# EAGLE board camera (EAGLE 6.5.0)
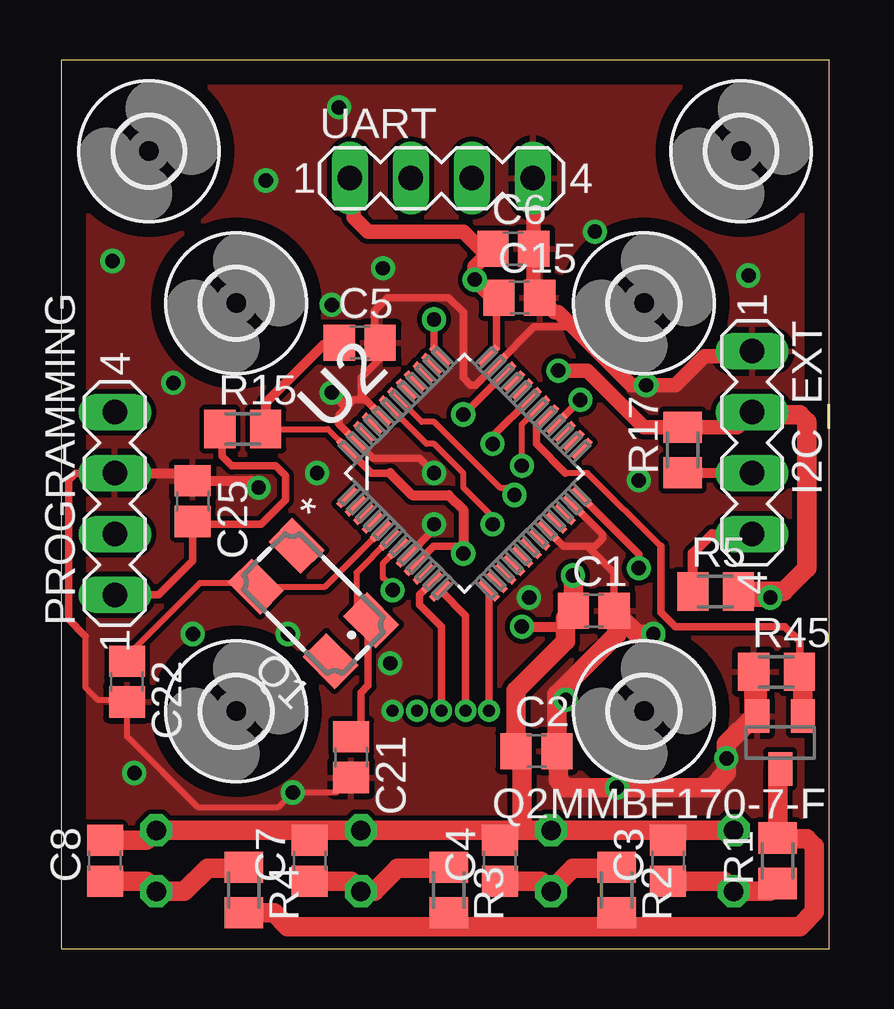
[diagram p0: board, top side]
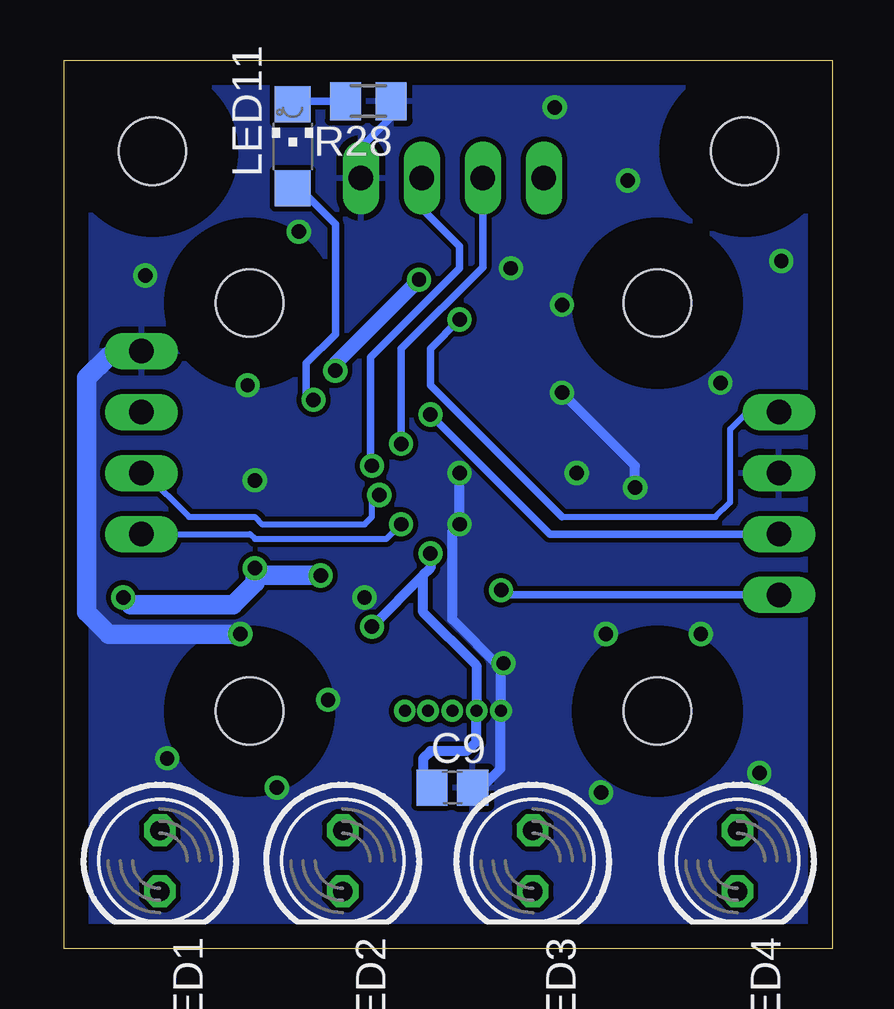
[diagram p1: board, bottom side, seen from below]

Size 32.03 x 37.02 mm. Coordinates in mm from the lower left corner, seen from the top.
Outline: 0,0 32.03,0 32.03,37.02 0,37.02 0,0
Copper layers (1*16): Top 0.035mm / dielectric 1.5mm / Bottom 0.035mm
Design rules "default": minimum track width 10mil, minimum drill 24mil, track to track 8mil, track to pad 8mil, pad to pad 8mil, via to via 8mil, smd to smd 8mil, copper to edge 40mil, drill to drill 8mil, minimum pad ring 10mil, minimum via ring 8mil, stop-mask expansion 4mil, vias tented up to drill 0mil, thermal gap 10mil

## Footprints (pad centres in the part's own frame; a part is rotated, then mirrored left to right if it is on the bottom)
C0805 = smd 1.3 x 1.5: 1 -0.85,0; 2 0.85,0
2,8 = hole 2.8: 0,0
MA04-1 = drill 1.016 long: 1 -3.81,0; 2 -1.27,0; 3 1.27,0; 4 3.81,0
LED5MM = drill 0.813 octagon: A -1.27,0; K 1.27,0
CHIPLED_1206 = smd 1.5 x 1.5: A 0,-1.75; C 0,1.75
CTS406 = smd 1.9 x 1.4: 1 -2.2,-1.2; 2 2.2,-1.2; 3 2.2,1.2; 4 -2.2,1.2
SOT23 = smd 1 x 1.4: 1 -0.95,-1.1; 2 0.95,-1.1; 3 0,1.1
M0805 = smd 1.3 x 1.6: 1 -0.95,0; 2 0.95,0
QFP50P900X900X160-48N = smd 1.041 x 0.279: 1 -4.166,2.743; 2 -4.166,2.261; 3 -4.166,1.753; 4 -4.166,1.245; 5 -4.166,0.762; 6 -4.166,0.254; 7 -4.166,-0.254; 8 -4.166,-0.762; 9 -4.166,-1.245; 10 -4.166,-1.753; 11 -4.166,-2.261; 12 -4.166,-2.743; 25 4.166,-2.743; 26 4.166,-2.261; 27 4.166,-1.753; 28 4.166,-1.245; 29 4.166,-0.762; 30 4.166,-0.254; 31 4.166,0.254; 32 4.166,0.762; 33 4.166,1.245; 34 4.166,1.753; 35 4.166,2.261; 36 4.166,2.743 | smd 0.279 x 1.041: 13 -2.743,-4.166; 14 -2.261,-4.166; 15 -1.753,-4.166; 16 -1.245,-4.166; 17 -0.762,-4.166; 18 -0.254,-4.166; 19 0.254,-4.166; 20 0.762,-4.166; 21 1.245,-4.166; 22 1.753,-4.166; 23 2.261,-4.166; 24 2.743,-4.166; 37 2.743,4.166; 38 2.261,4.166; 39 1.753,4.166; 40 1.245,4.166; 41 0.762,4.166; 42 0.254,4.166; 43 -0.254,4.166; 44 -0.762,4.166; 45 -1.245,4.166; 46 -1.753,4.166; 47 -2.261,4.166; 48 -2.743,4.166

## Placement (x,y rotation side)
C1  10uF  [C0805]  22.2,14.07 0 top
C2  100n  [C0805]  19.81,8.23 0 top
C3  100n  [C0805]  25.3,3.66 90 top
C4  100n  [C0805]  18.29,3.66 90 top
C5  100n  [C0805]  12.45,25.25 0 top
C6  10uF  [C0805]  18.85,29.16 0 top
C7  100n  [C0805]  10.36,3.66 90 top
C8  100n  [C0805]  1.83,3.66 90 top
C9  100n  [C0805]  15.85,6.71 0 bottom
C15  100n  [C0805]  19.1,27.13 0 top
C21  18p  [C0805]  12.09,7.98 270 top
C22  18p  [C0805]  2.74,11.13 270 top
C25  100n  [C0805]  5.49,18.64 270 top
H1  MOUNT-HOLE2.8  [2,8]  3.66,33.22 0 top
H2  MOUNT-HOLE2.8  [2,8]  28.35,33.22 0 top
H3  MOUNT-HOLE2.8  [2,8]  7.3,9.89 0 top
H4  MOUNT-HOLE2.8  [2,8]  24.3,9.89 0 top
H5  MOUNT-HOLE2.8  [2,8]  7.3,26.89 0 top
H6  MOUNT-HOLE2.8  [2,8]  24.3,26.89 0 top
I2C_EXT  [MA04-1]  28.8,21.08 270 top
LED1  [LED5MM]  28.04,3.66 270 bottom
LED2  [LED5MM]  20.42,3.66 270 bottom
LED3  [LED5MM]  12.5,3.66 270 bottom
LED4  [LED5MM]  3.96,3.66 270 bottom
LED11  [CHIPLED_1206]  22.5,33.43 0 bottom
PROGRAMMING  [MA04-1]  2.24,18.54 90 top
Q1  8MHz  [CTS406]  10.52,14.38 135 top
Q2MMBF170-7-F  BSS123  [SOT23]  29.97,8.59 180 top
R1  22R  [M0805]  29.87,3.66 90 top
R2  22R  [M0805]  23.16,2.44 270 top
R3  22R  [M0805]  16.15,2.44 270 top
R4  22R  [M0805]  7.62,2.44 270 top
R5  4k7  [M0805]  27.28,14.88 0 top
R15  47k  [M0805]  7.57,21.64 0 top
R17  4k7  [M0805]  25.91,20.78 90 top
R28  330  [M0805]  19.35,35.31 180 bottom
R45  47k  [M0805]  29.82,11.53 0 top
U2  STM32F103C6T6A  [QFP50P900X900X160-48N]  16.81,19.81 45 top
UART  [MA04-1]  15.85,32.11 0 top

## Library data of the parts
C1-C9 C15 C21 C22 C25 R1-R5 R15 R17 R28 R45 = resistor
H1-H6 = holes
I2C_EXT PROGRAMMING UART = con-lstb; OC_FARNELL: unknown; OC_NEWARK: unknown
LED1-LED4 LED11 = led
Q1 = crystal; OC_FARNELL: unknown; OC_NEWARK: unknown
Q2MMBF170-7-F = transistor-small-signal
U2 = stm32f103_lqfp48; MPN: STM32F103C6T6A; OC_FARNELL: 1972391; OC_NEWARK: 72T2643; PACKAGE: 48LQFP; SUPPLIER: STMicroelectronics

## Nets
+3V3: C1.1 C2.1 C3.2 C4.2 C5.1 C6.1 C7.2 C8.2 C9.1 C15.1 I2C_EXT.2 LED1.A LED2.A LED3.A LED4.A R5.2 R15.2 R17.2 U2.9 U2.24 U2.36 U2.48 UART.1
ADC1: U2.11
CLK: U2.12
GND: C1.2 C2.2 C5.2 C6.2 C9.2 C15.2 C21.2 C22.2 C25.1 I2C_EXT.1 PROGRAMMING.3 Q2MMBF170-7-F.2 R28.1 R45.1 U2.8 U2.20 U2.23 U2.35 U2.44 U2.47 UART.4
IR_CONTROLL: Q2MMBF170-7-F.1 R45.2 U2.29
LED_1: LED11.A U2.28
N$1: LED11.C R28.2
N$5: C3.1 LED1.K R1.1
N$7: C4.1 LED2.K R2.1
N$9: C7.1 LED3.K R3.1
N$11: C8.1 LED4.K R4.1
N$26: Q2MMBF170-7-F.3 R1.2 R2.2 R3.2 R4.2
OSCIN: C22.1 Q1.3 U2.5
OSCOUT: C21.1 Q1.1 U2.6
RESET: C25.2 PROGRAMMING.1 R15.1 U2.7
SCL: I2C_EXT.3 R17.1 U2.42
SDA: I2C_EXT.4 R5.1 U2.43
SI: U2.13
SWCLK: PROGRAMMING.4 U2.37
SWDIO: PROGRAMMING.2 U2.34
UART_RX: U2.31 UART.2
UART_TX: U2.30 UART.3
VBAT: U2.1

## Tracks (layer width: path | path; a pad name or v marks a point on that pad's centre or on a via)
+3V3  (via drill 0.5 pad 0.61, 0.6)
  Top 0.254: R15.2 11.11,21.64 U2.48
  Top 0.305: v16.76,16.46 16.46,16.76 15.53,16.76 U2.9 14.77,15.99 | 13.72,19.81 12.94,19.81 U2.48 | v24.08,15.85 24.08,16.43 U2.24 | U2.36 18.15,25.03 18.15,27.03 C15.1
  Top 0.406: 13.72,19.81 14.63,18.9 16.15,18.9 16.76,18.29 v16.76,16.46 | 17.79,28.96 C6.1 | v19.2,13.41 20.69,13.41 C1.1 | R15.2 8.53,21.66 8.53,22.76 10.92,25.15 11.49,25.15 C5.1
  Top 0.61: 17.79,28.96 17.68,28.96 16.76,29.87 12.8,29.87 12.19,30.48 12.19,31.95 UART.1 | 28.3,14.88 R5.2 | v20.73,24.08 21.95,24.08 24.3,21.73 R17.2 28.18,21.73 I2C_EXT.2 | C15.1 17.98,27.13 v17.24,27.87 17.24,28.4 C6.1
  Top 0.813: C8.2 3.54,4.51 LED4.A 10.67,4.93 | 18.71,4.93 LED3.A 10.67,4.93 | 25.3,4.93 LED2.A 18.95,4.93 | 25.3,4.93 LED1.A | C7.2 10.36,4.62 10.67,4.93 | 18.71,4.93 C4.2 | C3.2 25.3,4.93 | v21.34,15.54 v21.35,15.53 C1.1 21.03,13.75 21.03,12.8 18.96,10.73 C2.1 19.2,7.99 19.2,5.18 18.95,4.93 | v29.57,14.63 28.48,14.63 R5.2 | 28.3,14.88 30.12,14.88 31.09,15.85 31.09,21.95 30.79,22.25 28.91,22.25 I2C_EXT.2 | 18.71,4.93 18.95,4.93
  Bottom 0.406: v16.76,16.46 16.76,15.85 17.07,15.54 | 17.07,15.54 v19.2,13.41 | C9.1 17.07,6.77 17.07,7.92 16.76,8.23 15.24,8.23 14.85,8.62 14.85,9.89 v14.83,9.91 14.85,9.92 14.85,11.8 17.07,14.02 17.07,15.54
  Bottom 0.61: v20.73,24.08 20.73,24.38 v17.24,27.87
  Bottom 0.813: v21.34,15.54 23.77,15.54 v24.08,15.85 24.08,15.24 24.99,14.33 29.26,14.33 v29.57,14.63
ADC1  (via drill 0.5 pad 0.61)
  Top 0.305: U2.11 14.94,14.74 14.94,14.33 15.85,13.41 v15.85,9.91
CLK  (via drill 0.5 pad 0.61)
  Top 0.305: 15.54,14.66 U2.12 16.87,13.87 v16.87,9.91
GND  (via drill 0.5 pad 0.61, 0.6)
  Top 0.254: 1,13.02 1,10.88 1.52,10.36 2.65,10.36 C22.2 2.74,8.84 5.69,5.89 9.04,5.89 v9.65,6.5 11.47,6.5 C21.2
  Top 0.305: C1.2 23.05,15.66 21.95,16.76 | 21.95,16.76 20.94,16.76 U2.20 | 21.95,16.76 22.25,16.76 22.55,17.07 22.55,17.27 U2.23 | 12.69,22.86 12.19,22.86 11.89,22.56 11.58,22.25 11.58,21.85 U2.47 13.01,20.42 14.94,20.42 v15.54,19.81 | 12.69,22.86 U2.44 | v15.54,17.68 15.54,17.46 U2.8 | 21.64,25.6 21.34,25.91 19.71,25.91 U2.35 17.27,23.47 17.07,23.47 16.76,23.77 16.76,26.52 16.15,27.13 13.61,27.13 13.06,26.57 13.06,25.49 C5.2 13.3,24.57 12.5,23.77 12.5,23.05 12.69,22.86 | 1,13.02 0.3,13.72 0.3,19.51 0.61,19.81 PROGRAMMING.3
  Top 0.406: PROGRAMMING.3 5.17,19.81 C25.1 7.94,19.49 v8.23,19.2 | v11.28,23.16 11.89,22.56
  Top 0.61: UART.4 19.7,32.07 C6.2 19.7,27.38 C15.2 20.56,26.52 20.73,26.52 21.64,25.6 23.77,23.47 25.6,23.47 26.82,24.69 28.6,24.69 I2C_EXT.1
  Top 0.813: Q2MMBF170-7-F.2 29.02,11.38 R45.1 28.87,9.67 27.74,8.53 v27.74,7.92 27.74,7.32 27.13,6.71 v23.16,6.71 21.03,6.71 20.73,7.01 20.73,8.17 C2.2 20.66,10.6 23.16,13.11 23.16,13.96 C1.2 24.02,13.11 v24.69,13.11
  Bottom 0.305: R28.1 18.41,34.63 19.81,33.22 19.81,32.26 UART.4
  Bottom 0.406: v8.23,19.2 8.23,20.12 v11.28,23.16 | v15.54,19.81 v15.54,17.68 15.85,17.37 15.85,13.72 13.82,11.68 v13.82,9.91 13.85,9.87 13.85,7.49 14.63,6.71 C9.2
  Bottom 0.813: I2C_EXT.1 29.01,24.69 30.18,24.69 31.09,23.77 31.09,14.02 30.18,13.11 v24.69,13.11
  other vias: 19.51,14.63 3.05,7.32 9.45,13.11 5.49,13.11 2.13,28.65 11.58,35.05 13.41,28.35 4.67,23.57 21.03,10.36 10.67,19.81 28.65,28.04 24.08,19.51 11.28,26.82 8.53,32 24.38,23.47 22.25,29.87 13.72,11.89
  pour Bottom: -4.27,38.4 32.92,38.4 32.92,-3.05 -4.27,-3.05
  pour Top: -1.83,40.84 34.14,40.84 34.14,-3.66 -1.83,-3.66
IR_CONTROLL
  Top 0.254: 24.99,16.76 21.95,19.81 21.03,19.81
  Top 0.305: 21.03,19.81 19.81,21.03 19.81,21.73 U2.29 | 24.99,16.76 24.99,14.02 25.6,13.41 30.18,13.41 30.79,12.8 30.79,11.55 R45.2
  Top 0.813: Q2MMBF170-7-F.1 30.92,11.38 R45.2
LED_1  (via drill 0.6)
  Top 0.305: U2.28 20.66,21.88 v21.64,22.86
  Bottom 0.305: LED11.A 22.23,31.68 20.73,30.18 20.73,25.6 21.95,24.38 21.95,23.16 v21.64,22.86
N$1
  Bottom 0.305: R28.2 22.38,35.31 LED11.C
N$5
  Top 0.813: C3.1 27.62,2.81 LED1.K 29.55,2.39 R1.1
N$7
  Top 0.813: C4.1 20,2.81 LED2.K 20.42,2.44 21.34,3.35 23.13,3.35 R2.1
N$9
  Top 0.813: C7.1 12.08,2.81 LED3.K 13.06,2.39 14.02,3.35 16.12,3.35 R3.1
N$11
  Top 0.813: C8.1 3.54,2.81 LED4.K 5.13,2.39 6.1,3.35 7.58,3.35 R4.1
N$26
  Top 0.813: R4.2 8.88,1.49 9.45,0.91 16.46,0.91 | 16.46,0.91 22.59,0.91 | 22.59,0.91 R2.2 | R3.2 16.15,1.22 16.46,0.91 | 30.21,4.88 R1.2 | Q2MMBF170-7-F.3 29.87,7.38 R1.2 | 22.59,0.91 30.79,0.91 31.39,1.52 31.39,4.27 31.09,4.57 29.91,4.57 R1.2
OSCIN
  Top 0.254: C22.1 2.74,12.19 5.79,15.24 7.96,15.24 Q1.3 11.01,15.08 U2.5
OSCOUT
  Top 0.254: U2.6 12.31,15.67 12.31,14.28 Q1.1 | 12.5,9.23 C21.1
  Top 0.305: 12.5,9.23 12.5,10.67 12.8,10.97 12.8,13.55 Q1.1
RESET  (via drill 0.6)
  Top 0.254: v13.82,14.94 13.82,15.04 13.41,15.44 13.41,16.05 U2.7
  Top 0.305: 5.37,17.68 C25.2 | C25.2 5.6,17.68 8.33,17.68 9.35,18.69 9.35,19.71 8.94,20.12 7.11,20.12 6.71,20.52 6.71,20.94 7.01,21.25 R15.1 | PROGRAMMING.1 4.06,14.73 5.49,16.15 C25.2
  Top 0.61: R15.1 6.71,21.64 6.71,21.34
  Bottom 0.305: PROGRAMMING.1 13.61,14.73 v13.82,14.94
SCL  (via drill 0.6)
  Top 0.254: U2.42 15.04,21.95 15.54,21.95 18.29,19.2 18.59,19.2 v18.9,18.9
  Top 0.406: R17.1 28.79,19.83 I2C_EXT.3
  Bottom 0.254: I2C_EXT.3 28.65,19.81 26.82,17.98 24.08,17.98 23.77,17.68 19.51,17.68 19.2,17.98 19.2,18.59 v18.9,18.9
SDA  (via drill 0.6)
  Top 0.254: v17.98,17.68 17.98,17.98 16.76,19.2 16.76,19.81 15.54,21.03 15.24,21.03 U2.43
  Top 0.406: R5.1 26.33,16.47 27.13,17.27 I2C_EXT.4
  Bottom 0.254: I2C_EXT.4 24.28,17.27 24.08,17.07 18.59,17.07 v17.98,17.68
SI  (via drill 0.5 pad 0.61)
  Top 0.305: 17.85,14.9 U2.13 17.83,14.92 v17.83,9.91
SWCLK  (via drill 0.6)
  Top 0.305: v15.54,26.21 15.54,24.96 U2.37
  Bottom 0.254: 11.28,17.98 4.88,17.98 4.27,18.59 4.27,21.64 3.66,22.25 2.34,22.25 PROGRAMMING.4
  Bottom 0.305: 11.28,17.98 16.76,23.47 16.76,24.99 v15.54,26.21
SWDIO  (via drill 0.6)
  Top 0.305: v16.76,22.25 16.77,22.25 U2.34
  Bottom 0.305: PROGRAMMING.2 11.79,17.27 v16.76,22.25
UART_RX  (via drill 0.6)
  Top 0.305: v17.98,21.03 17.98,21.34 U2.31
  Bottom 0.305: UART.2 14.58,28.4 17.98,24.99 v17.98,21.03
UART_TX  (via drill 0.6)
  Top 0.254: v19.2,20.12 19.2,21.84 U2.30
  Bottom 0.305: UART.3 17.12,30.84 15.54,29.26 15.54,28.35 19.25,24.64 19.25,20.17 v19.2,20.12